# Altium PCB SmartCubeExtension.PcbDoc
Units mm, origin at the board's own origin, x right, y up, seen from the top; angles counter-clockwise.
Board outline 15 x 65 mm, 2 copper layers (Top Layer, Bottom Layer); 3 components, 11 nets, 72 pads, 26 vias.
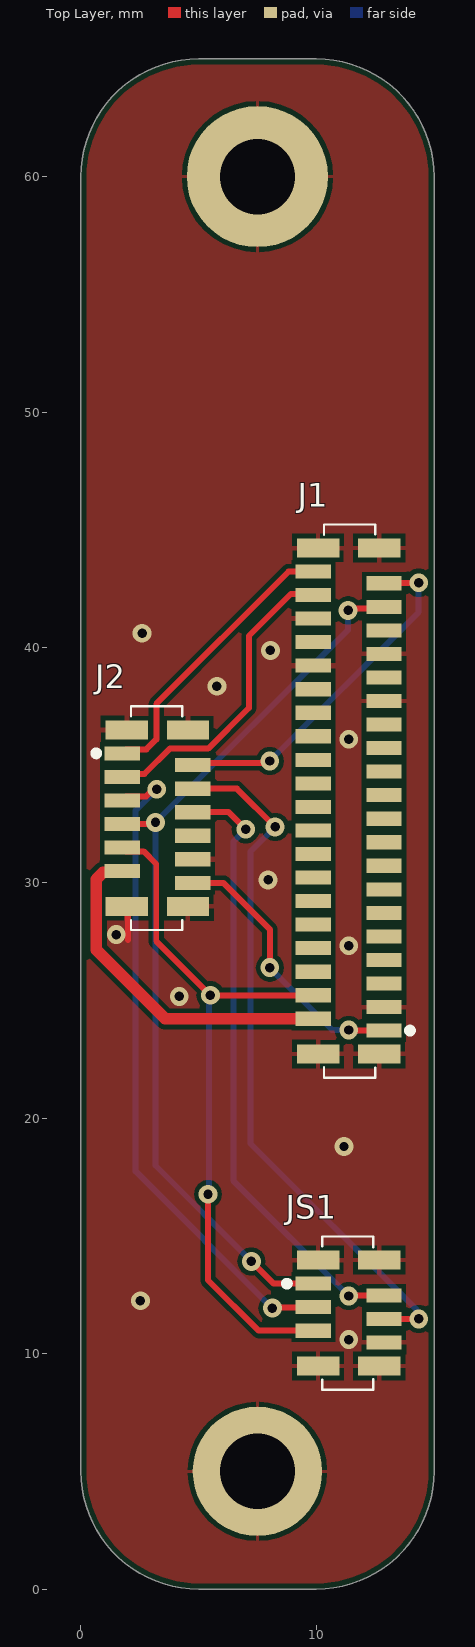
[diagram p0: Top Layer view]
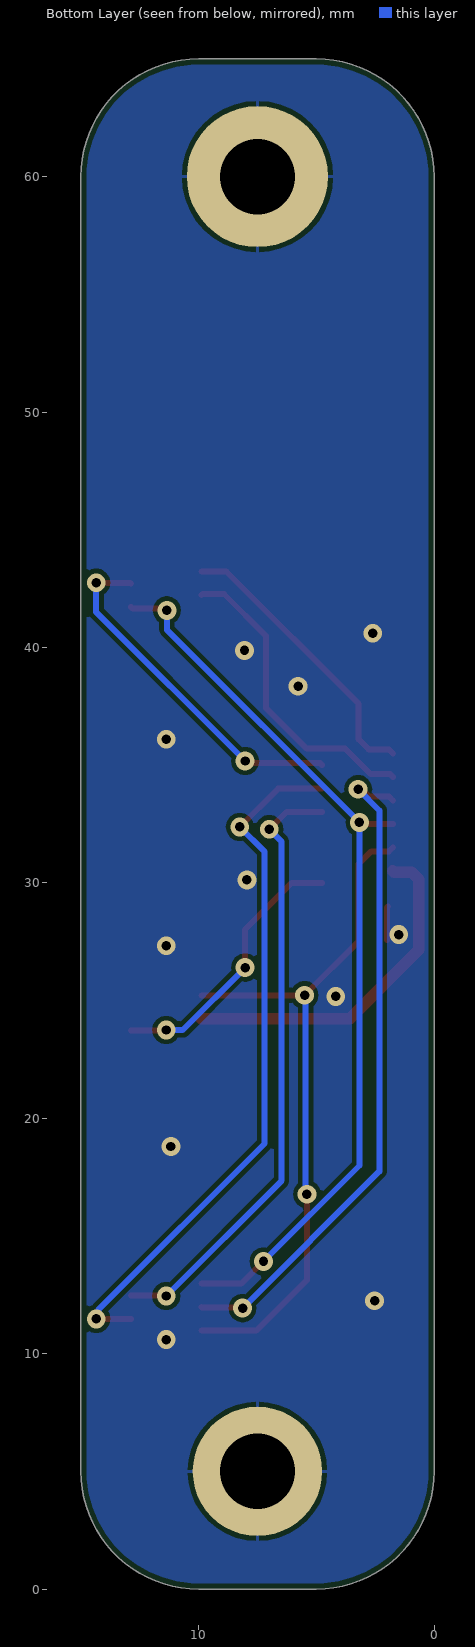
[diagram p1: Bottom Layer view, seen from below]
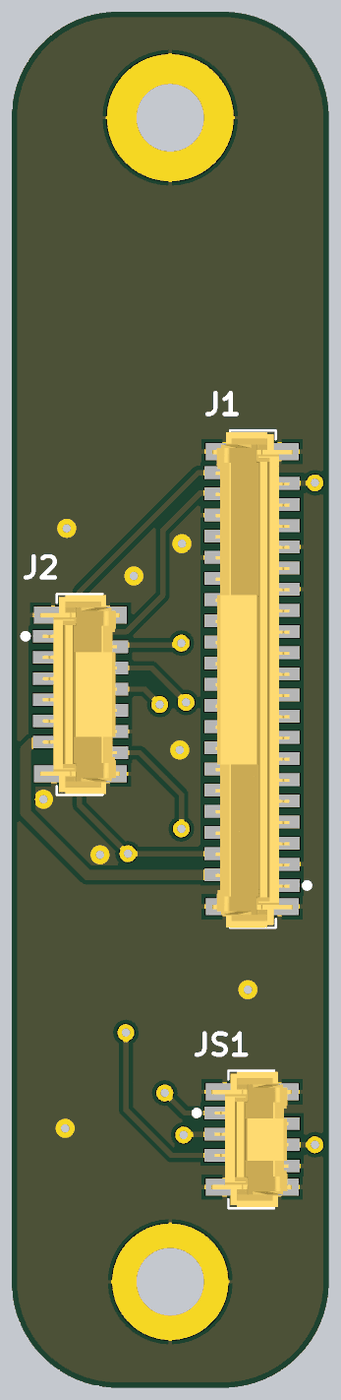
[diagram p2: 3D render of the assembled board from above, using the file's embedded part models]

## Layer stack, top to bottom
Top Solder: solder mask 0.0102, Solder Resist, Dk 3.5
Top Layer: signal copper 0.0356
Dielectric 1: dielectric 0.32, FR-4, Dk 4.8
Bottom Layer: signal copper 0.0356
Bottom Solder: solder mask 0.0102, Solder Resist, Dk 3.5

## Board outline
0,5 0,60 cw(c5,60) 5,65 10,65 cw(c10,60) 15,60 15,5 cw(c10,5) 10,0 5,0 cw(c5,5)

## Design rules (kind name [scope] priority, off if disabled: settings)
AcuteAngle [All] p1: minimum=3.50000000000000E+0001 checktracksonly=FALSE
BoardOutlineClearance "BoardOutlineClearance 1" [All] p1: gap=0.25 ignorepadtopadclearanceinfootprint=FALSE except(0: Arc-SplitContinuation Track-SplitContinuation SMDPad-SplitContinuation THPad-SplitContinuation Via-SplitContinuation Fill-SplitContinuation Poly-SplitContinuation Region-SplitContinuation Text-SplitContinuation) // Milling
Clearance "Clearance-1 1/2 Oz" [All] p1: gap=0.125 ignorepadtopadclearanceinfootprint=FALSE except(0.2: Arc-Fill Arc-Poly Track-Fill Track-Poly SMDPad-SMDPad SMDPad-Fill SMDPad-Poly THPad-Fill THPad-Poly Via-Fill Via-Poly Fill-Fill Fill-Poly Poly-Poly Poly-Region Poly-Text; 0.25: Arc-Hole Track-Hole SMDPad-Hole THPad-Hole Via-Hole Fill-Hole Poly-Hole Region-Hole Text-Hole) // Standart
ComponentClearance [All] p1: gap=0.1 collisioncheckmode=3 verticalgap=0.1 showdistances=FALSE
DiffPairsRouting "DiffPairsRouting 1/2 Oz" [All] p1: maxlimit=0.254 minlimit=0.125 mostfreqgap=0.254 toplayer_minwidth=0.125 toplayer_maxwidth=0.381 toplayer_prefwidth=0.381 bottomlayer_minwidth=0.125 bottomlayer_maxwidth=0.381 bottomlayer_prefwidth=0.381 maxuncoupledlength=12.7
HoleSize "Minimum HoleSize" [IsPad] p1: absolutevalues=TRUE maxlimit=5.9 minlimit=0.6 maxpercent=80.000 minpercent=20.000
HoleSize "Minimum HoleSize VIA 1" [IsVia] p2: absolutevalues=TRUE maxlimit=5.9 minlimit=0.3 maxpercent=80.000 minpercent=20.000 // Standart
HoleToHoleClearance Hole2HoleClearance [All] p1: gap=0.25 allowstackedmicrovias=FALSE
MinimumAnnularRing "Minimum AR VIA Standart" [All] p1: minimumring=0.15
MinimumAnnularRing "Minimum AR PAD Standart" [All] p2: minimumring=0.2
MinimumSolderMaskSliver "SolderMask Bridge Standart" [All] p1: minsoldermaskwidth=0.15 // All Masks
PlaneClearance "PlaneClearance-1 1/2 Oz" [All] p1: clearance=0.2 // Standart
PlaneConnect "TermalConnect-1 1/2 Oz" [All] p1: planeconnectstyle=Relief reliefexpansion=0.2 reliefentries=4 reliefconductorwidth=0.2 reliefairgap=0.2 // Standart
PolygonConnect "PolygonConnect-1 1/2 Oz" [All] p1: thpad.connectstyle=Relief thpad.reliefconductorwidth=0.15 thpad.reliefentries=4 thpad.polygonreliefangle="90 Angle" thpad.airgapwidth=0.2 smdpad.connectstyle=Relief smdpad.reliefconductorwidth=0.2 smdpad.reliefentries=4 smdpad.polygonreliefangle="90 Angle" smdpad.airgapwidth=0.2 via.connectstyle=Direct via.reliefconductorwidth=0.254 via.reliefentries=4 via.polygonreliefangle="90 Angle" via.airgapwidth=0.254 // Standart
RoutingCorners [All] p1 off: cornerstyle=45-Degree minsetback=2.54 maxsetback=2.54
RoutingVias [All] p1: holewidth=0.4 width=0.8 viastyle="Through Hole" minholewidth=0.3 minwidth=0.6 maxholewidth=5.9 maxwidth=8.9
SilkToSilkClearance Silk2SilkClearance [All] p1 off: silktosilkclearance=0.15
SilkToSolderMaskClearance Silk2SolderMaskClearance [IsPad] p1 off: minsilkscreentomaskgap=0.15 clearancetoexposedcopper=TRUE
SolderMaskExpansion SolderMaskExpansion-1 [All] p1: expansion=0.05 istentingtop=FALSE // Standart
UnRoutedNet [All] p1: checkbadconnections=TRUE
Width "Width 1/2 Oz" [All] p1: maxlimit=10 minlimit=0.125 preferedwidth=0.254 checkconnectedcopper=TRUE
19 further rules are at their usual default settings.

## Components (designator, comment, footprint, x,y, rotation, side; value= is the part's Value field where it differs from the comment)
J1 "FPC/FFC Conn" "FH12-40S Vertical" 9.875,33.475 r270 top
J2 "FPC/FFC Conn" "FH12-12S Vertical" 4.75,25.75 r90 top
JS1 "FPC/FFC Conn" "FH12-6s Vertical" 12.875,3.475 r90 top

## Footprints (in the part's own frame and the unit in brackets; to place one, negate y for a bottom-side part, rotate by r counter-clockwise, add the part's x,y. Pads: shape width x height; smd on the part's side, far side on the other; paste and mask are expansions set on the pad)
"FH12-6s Vertical" [mm]
  rect 0.6x1.5 smd: 1(9.5,3) 2(9,0) 3(8.5,3) 4(8,0) 5(7.5,3) 6(7,0)
  rect 0.8x1.8 smd: A(6,0.2) A(6,2.8) A(10.5,0.2) A(10.5,2.8)
  silkscreen extent 5,0.45 11.5,4.22, body extent 5.05,-0.37 11.45,3.43, height 5.5
"FH12-12S Vertical" [mm]
  rect 0.6x1.5 smd: 1(9.75,3) 2(9.25,0) 3(8.75,3) 4(8.25,0) 5(7.75,3) 6(7.25,0) 7(6.75,3) 8(6.25,0) 9(5.75,3) 10(5.25,0) 11(4.75,3) 12(4.25,0)
  rect 0.8x1.8 smd: A(3.25,0.2) A(3.25,2.8) A(10.75,0.2) A(10.75,2.8)
  silkscreen extent 2.25,0.45 11.75,4.2, body extent 2.3,-0.38 11.7,3.43, height 5.53
"FH12-40S Vertical" [mm]
  rect 0.6x1.5 smd: 1(9.75,3) 2(9.25,0) 3(8.75,3) 4(8.25,0) 5(7.75,3) 6(7.25,0) 7(6.75,3) 8(6.25,0) 9(5.75,3) 10(5.25,0) 11(4.75,3) 12(4.25,0) 13(3.75,3) 14(3.25,0) 15(2.75,3) 16(2.25,0) 17(1.75,3) 18(1.25,0) 19(0.75,3) 20(0.25,0) 21(-0.25,3) 22(-0.75,0) 23(-1.25,3) 24(-1.75,0) 25(-2.25,3) 26(-2.75,0) 27(-3.25,3) 28(-3.75,0) 29(-4.25,3) 30(-4.75,0) 31(-5.25,3) 32(-5.75,0) 33(-6.25,3) 34(-6.75,0) 35(-7.25,3) 36(-7.75,0) 37(-8.25,3) 38(-8.75,0) 39(-9.25,3) 40(-9.75,0)
  rect 0.8x1.8 smd: A(-10.75,0.2) A(-10.75,2.8) A(10.75,0.2) A(10.75,2.8)
  silkscreen extent -11.75,0.45 11.75,4.2, body extent -11.68,-0.38 11.73,3.43, height 5.55

## Part data
J1: library part "Conn40x1 (FH12 Vertical)", "Connector to Display's trail", Manufacturer="Hirose Electric", Part Number=FH12-40S-0.5SVA(54), ComponentLink1Description=Chip&Dip, ComponentLink1URL=https://www.chipdip.ru/product1/8002082143, Type=Connector
J2: library part "Conn12x1 (FH12 Vertical)", "Connector to trail", Manufacturer="Hirose Electric", Part Number=FH12-12S-0.5SVA(54), ComponentLink1Description=Mouser, ComponentLink1URL=https://ru.mouser.com/ProductDetail/Hirose-Connector/FH12-12S-05SVA54?qs=%2Fha2pyFadugx2rsdyHDVcXwbI8krQaq6%252BPNTW5YGSdYzC8JBsy5pU75ViyDjvRCP, Type=Connector
JS1: library part "Conn6x1 (FH12 Vertical)", "Connector to touch sensor's trail", Manufacturer="Hirose Electric", Part Number=FH12-6S-0.5SVA(54), ComponentLink1Description=Mouser, ComponentLink1URL=https://ru.mouser.com/ProductDetail/Hirose-Connector/FH12-6S-05SVA54?qs=%2Fha2pyFaduhYbZFVunKSgIpYMlkzngMoGcACEbztduQ1P2V6tcZCQQ%3D%3D, Type=Connector

## Free pads (board coordinates)
  round 5.5 hole 3.2: A(7.5,5)
  round 6 hole 3.2: A(7.5,60)

## Via types
v1: diameter 0.8, hole 0.4, Top Layer to Bottom Layer, 26 vias

## Nets (pads, with @x,y where several pads share a name; then routed paths per layer and width w, separated by ;. In a path a pad name is that pad's centre, name@x,y a point inside that pad or via, vN(x,y) a via of type N, cw(c..) or ccw(c..) an arc to the next point about the centre after c; other vN are vias at no path point)
+3.3V: J1.4 J2.9 JS1.5 | length 30.1
  Top Layer w0.254: J2.9 1.915,31.335 2.665,31.335 3.2,30.8 3.2,27.525 v1(5.5,25.225) J1.4 ; v1(5.4,16.775) 5.4,13.125 7.55,10.975 JS1.5
  Bottom Layer w0.254: v1(5.4,16.775) 5.45,16.825 5.45,25.175 v1(5.5,25.225)
+12V: J1.2 J2.11 | length 14.7
  Top Layer w0.5: J2.11 1.7,30.45 0.943,30.45 0.65,30.157 0.65,27.15 3.575,24.225 J1.2
GND: J1.3 J1.29 J1.32 J1.33 J1.36 J1.A J2.10 J2.A JS1.6 JS1.A pad.A | length 1.4
  Top Layer w0.254: J2.A@1.95,29 2,28.95 2,27.575
  other v1: 11.375,10.6 2.525,12.25 11.175,18.8 4.175,25.175 11.375,27.325 1.5,27.8 7.95,30.125 11.375,36.1 5.775,38.35 8.05,39.875 2.6,40.6
INT_Touch6: J2.6 JS1.2 | length 26.1
  Top Layer w0.254: J2.6 6.275,33 v1(7,32.275) ; v1(11.375,12.45) 11.388,12.463 12.863,12.463 JS1.2
  Bottom Layer w0.254: v1(7,32.275) 6.475,31.75 6.475,17.35 v1(11.375,12.45)
LCD_LED_PWM6: J1.1 J2.12 | length 11.7
  Top Layer w0.254: J2.12 6.05,30 8.025,28.025 v1(8.025,26.4) ; v1(11.375,23.75) 11.387,23.738 12.862,23.738 J1.1
  Bottom Layer w0.254: v1(8.025,26.4) 10.675,23.75 v1(11.375,23.75)
Reset_LCD&Touch: J1.37 J2.7 JS1.1 | length 38.8
  Top Layer w0.254: J2.7 3.101,32.5 v1(3.168,32.567) ; v1(7.242,13.919) 8.187,12.975 JS1.1 ; v1(11.35,41.575) 11.425,41.65 12.8,41.65 J1.37
  Bottom Layer w0.254: v1(7.242,13.919) 3.168,17.993 v1(3.168,32.567) 11.35,40.749 v1(11.35,41.575)
STM_I2C_SCL: J2.5 JS1.3 | length 28.2
  Top Layer w0.254: J2.5 1.923,33.673 2.775,33.673 3.077,33.975 v1(3.225,33.975) ; v1(8.133,11.935) 8.153,11.955 9.855,11.955 JS1.3
  Bottom Layer w0.254: v1(3.225,33.975) 2.325,33.075 2.325,17.743 v1(8.133,11.935)
STM_I2C_SDA: J2.4 JS1.4 | length 29.9
  Top Layer w0.254: J2.4 6.625,34 v1(8.25,32.375) ; JS1.4 v1(14.35,11.475)
  Bottom Layer w0.254: v1(8.25,32.375) 7.198,31.323 7.198,18.927 14.246,11.879 14.246,11.579 v1(14.35,11.475)
VSPI_CS_LCD6: J1.40 J2.1 | length 12.2
  Top Layer w0.254: J2.1 1.923,35.673 2.779,35.673 3.202,36.096 3.202,37.602 8.825,43.225 J1.40
VSPI_MOSI: J1.38 J2.3 | length 13.2
  Top Layer w0.254: J2.3 1.878,34.628 2.703,34.628 3.775,35.7 5.406,35.7 7.142,37.435 7.142,40.492 8.92,42.27 9.83,42.27 J1.38
VSPI_SCLK: J1.39 J2.2 | length 15
  Top Layer w0.254: J2.2 4.837,35.087 7.938,35.087 v1(8.025,35.175) ; J1.39 12.888,42.737 14.338,42.737 v1(14.35,42.75)
  Bottom Layer w0.254: v1(8.025,35.175) 14.35,41.5 v1(14.35,42.75)
pads on no net: J1.5 J1.6 J1.7 J1.8 J1.9 J1.10 J1.11 J1.12 J1.13 J1.14 J1.15 J1.16 J1.17 J1.18 J1.19 J1.20 J1.21 J1.22 J1.23 J1.24 J1.25 J1.26 J1.27 J1.28 J1.30 J1.31 J1.34 J1.35 J2.8

## Polygon pours and split planes (outlines as drawn)
GND on Top Layer "Top Layer-No Net" (solid, remove dead copper, pour order 0): 0,5 0,60 cw(c5,60) 5,65 10,65 cw(c10,60) 15,60 15,5 cw(c10,5) 10,0 5,0 cw(c5,5)
GND on Bottom Layer "Top Layer-No Net1" (solid, remove dead copper, pour order 2): 0,5 0,60 cw(c5,60) 5,65 10,65 cw(c10,60) 15,60 15,5 cw(c10,5) 10,0 5,0 cw(c5,5)

## Silkscreen, mask and mechanical layers (free items; w line width, h text height)
Mechanical 1:
  the board outline again, w0.1